# Altium PCB PCB2.PcbDoc
Units mm, origin at the board's own origin, x right, y up, seen from the top; angles counter-clockwise.
Board outline 100 x 60 mm, 2 copper layers (Top Layer, Bottom Layer); 35 components, 24 nets, 81 pads, 0 vias.
Unrouted connection lines stored in the file: 1.
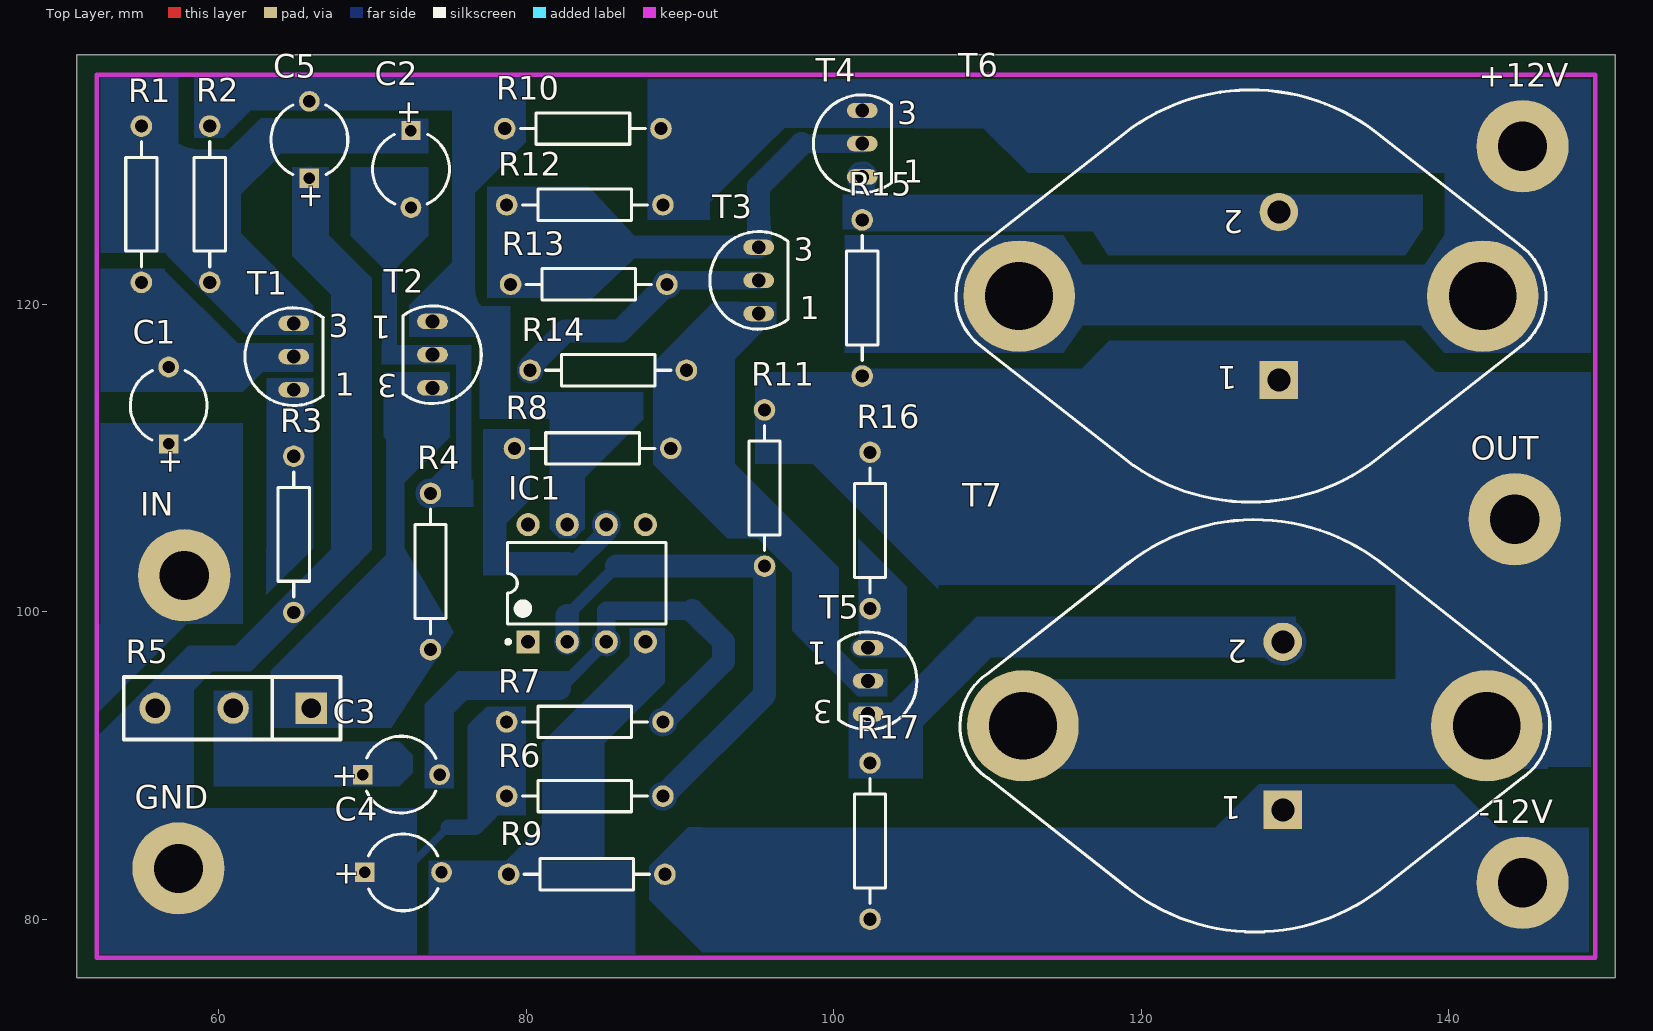
[diagram p0: Top Layer view]
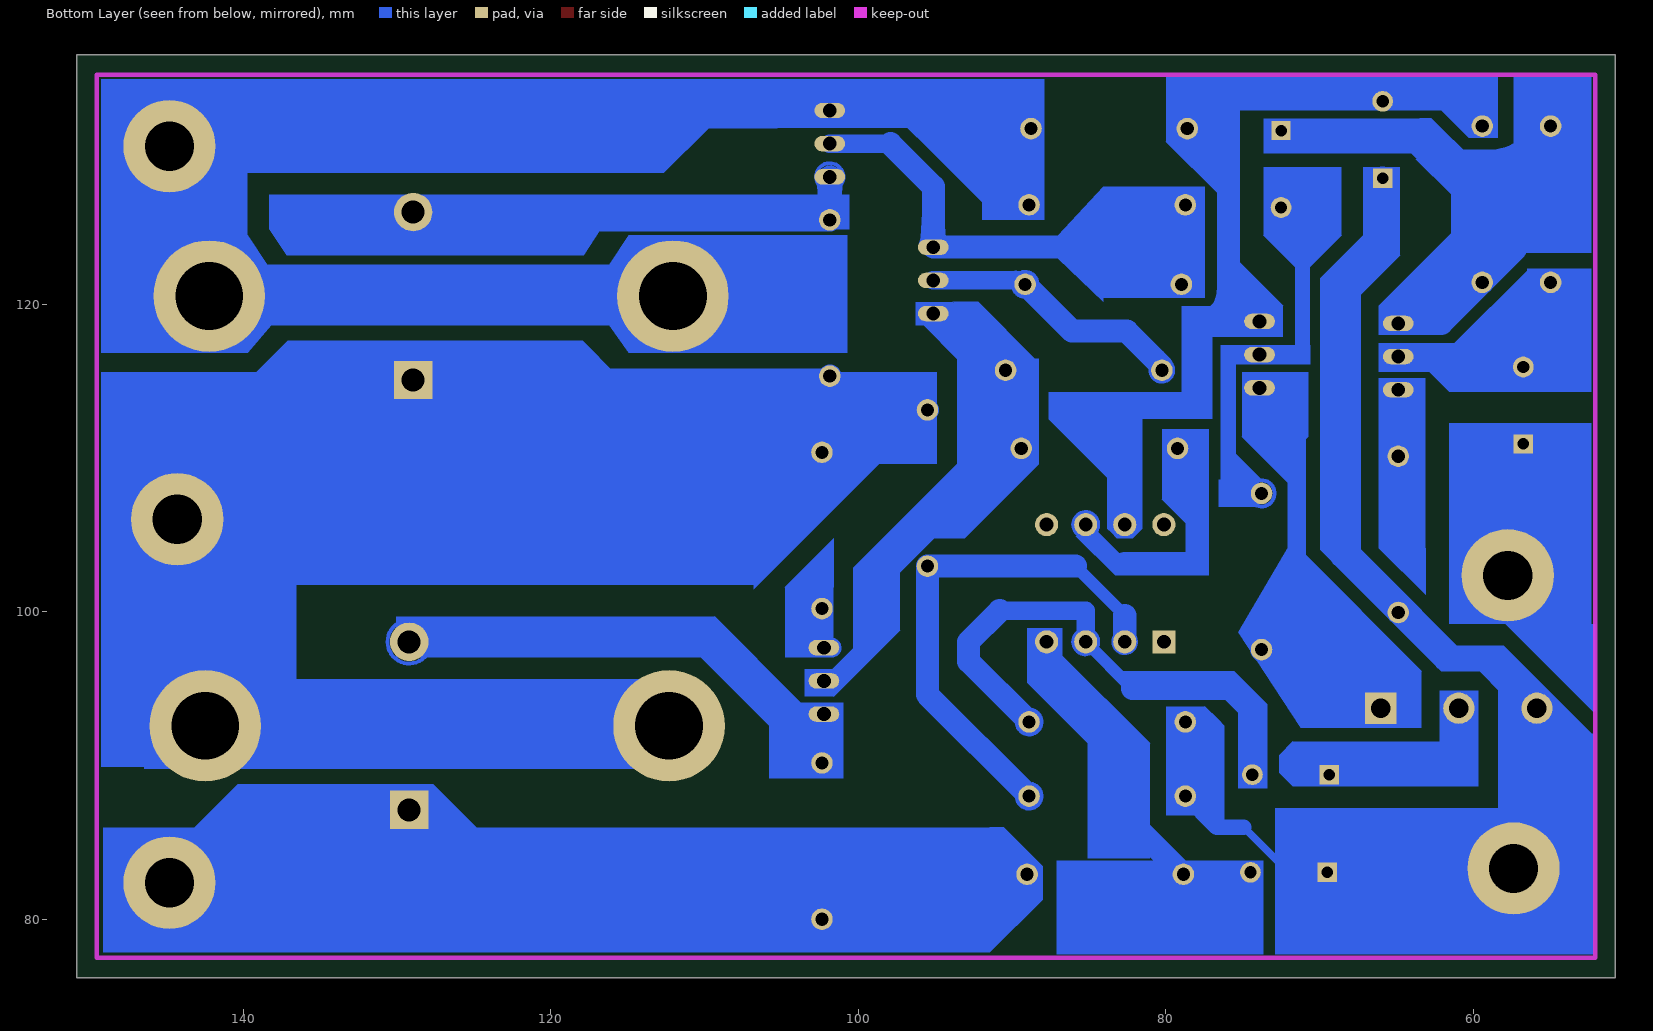
[diagram p1: Bottom Layer view, seen from below]

## Layer stack, top to bottom
Top Solder: solder mask 0.0102, Solder Resist, Dk 3.5
Top Layer: signal copper 0.0356
Dielectric 1: dielectric 0.32, FR-4, Dk 4.8
Bottom Layer: signal copper 0.0356
Bottom Solder: solder mask 0.0102, Solder Resist, Dk 3.5

## Board outline
50.8,76.2 150.8,76.2 150.8,136.2 50.8,136.2

## Design rules (kind name [scope] priority, off if disabled: settings)
Clearance [All] p1: gap=0.3
PolygonConnect [All] p1: connectstyle=Relief reliefconductorwidth=0.254 reliefentries=4 polygonreliefangle="90 Angle" airgapwidth=0.254
RoutingVias [All] p1: holewidth=0.8 width=1.6 viastyle="Through Hole" minholewidth=0.711 minwidth=1.27 maxholewidth=0.711 maxwidth=1.27
SolderMaskExpansion [All] p1: expansion=0.102
Width [All] p1: maxlimit=0.3 minlimit=0.3 preferedwidth=0.3
30 further rules are at their usual default settings.

## Components (designator, comment, footprint, x,y, rotation, side; value= is the part's Value field where it differs from the comment)
+12V "TP" TP2 144.78,130.264 r0 top
-12V "TP" TP2 144.78,82.385 r0 top
C1 "" CAPPR5-5x5 56.769,113.411 r90 top
C2 "" CAPPR5-5x5 72.517,128.778 r270 top
C3 "" CAPPR5-5x5 71.882,89.408 r0 top
C4 "" CAPPR5-5x5 72.009,83.058 r0 top
C5 "" CAPPR5-5x5 65.913,130.683 r90 top
GND "TP" TP2 57.404,83.312 r0 top
IC1 "uA741" DIP-8 83.947,101.854 r90 top
IN "TP" TP2 57.785,102.362 r0 top
OUT "TP" TP2 144.272,106.007 r0 top
R1 "" AXIAL-0.4 54.991,126.492 r90 top
R2 "" AXIAL-0.4 59.436,126.492 r90 top
R3 "" AXIAL-0.4 64.897,105.029 r90 top
R4 "" AXIAL-0.4 73.787,102.616 r270 top
R5 "RPOT" RPOT 66.04,93.726 r180 top
R6 "" AXIAL-0.4 83.82,88.011 r0 top
R7 "" AXIAL-0.4 83.82,92.837 r0 top
R8 "" AXIAL-0.4 84.328,110.617 r0 top
R9 "" AXIAL-0.4 83.947,82.931 r0 top
R10 "" AXIAL-0.4 83.693,131.407 r0 top
R11 "" AXIAL-0.4 95.504,108.039 r90 top
R12 "" AXIAL-0.4 83.82,126.454 r0 top
R13 "" AXIAL-0.4 84.074,121.285 r180 top
R14 "" AXIAL-0.4 85.344,115.697 r180 top
R15 "" AXIAL-0.4 101.854,120.396 r270 top
R16 "" AXIAL-0.4 102.362,105.283 r90 top
R17 "" AXIAL-0.4 102.362,85.09 r90 top
T1 "9014" TANS 64.897,116.586 r0 top
T2 "9012" TANS 73.914,116.713 r180 top
T3 "9014" TANS 95.123,121.539 r0 top
T4 "8050" TANS 101.854,130.429 r0 top
T5 "8550" TANS 102.235,95.504 r180 top
T6 "2N3055" TO-3 127.127,120.523 r180 top
T7 "2N3055" TO-3 127.381,92.583 r180 top

## Footprints (in the part's own frame and the unit in brackets; to place one, negate y for a bottom-side part, rotate by r counter-clockwise, add the part's x,y. Pads: shape width x height; smd on the part's side, far side on the other; paste and mask are expansions set on the pad)
AXIAL-0.4 [mm] "Axial Device, Thru-Hole; 2 Leads; 0.4 in Pin Spacing"
  round 1.4 hole 0.85: 1(-5.08,0) 2(5.08,0)
  silkscreen extent -4.06,-1.02 4.06,1.02
CAPPR5-5x5 [mm] "Capacitor, Electrolytic, Radial; Body 5 x 5 mm (Dia.xH typ); Pin Spacing 5 mm (typ)"
  rect 1.25x1.25 hole 0.75: 1(-2.5,0)
  round 1.35 hole 0.8: 2(2.5,0)
  silkscreen extent -2.26,-2.5 2.27,2.5
DIP-8 [mm] "DIP; 8 Leads; Row Spacing 7.62 mm; Pitch 2.54 mm"
  rect 1.5x1.5 hole 0.9: 1(-3.81,3.81)
  round 1.5 hole 0.9: 2(-3.81,1.27) 3(-3.81,-1.27) 4(-3.81,-3.81) 5(3.81,-3.81) 6(3.81,-1.27) 7(3.81,1.27) 8(3.81,3.81)
  silkscreen extent -3.93,-5.15 2.65,5.23, body extent -3.6,-5.15 3.6,5.15, height 5.08
RPOT [mil]
  rect 80x80 hole 50: 1(0,0)
  round 80 hole 50: 2(200,0) 3(400,0)
  silkscreen extent -75,-80 480,80
TANS [mm] "TO, Flat Index; 3 In-Line, Axial Leads; Body Dia. 4.5mm; Leads 0.51 x 0.48 mm (max)"
  oval 2x1 hole 0.9: 1(0,-2.159) 2(0,0) 3(0,2.159)
  silkscreen extent -3.17,-3.17 1.92,3.17
TO-3 [mm]
  rect 2.5x2.5 hole 1.5: 1(-1.815,5.46)
  round 2.5 hole 1.5: 2(-1.815,-5.46)
  round 7.25 hole 4.4: 3(-15.075,0) 3(15.075,0)
  silkscreen extent -19.17,-13.4 19.17,13.4
TP2 [mm]
  round 6 hole 3.2: 1(0,0)

## Part data
C1 C2 C3 C4 C5: library part Cap, "Capacitor"
IC1: "OAP"
R1 R2 R3 R4 R6 R7 R8 R9 R10 R11 R12 R13 R14 R15 R16 R17: library part Res2, "Resistor"
R5: "Potentiometer"
T1 T3 T4 T6 T7: library part 2N3904, "NPN General Purpose Amplifier"
T2 T5: library part 2N3906, "PNP General Purpose Amplifier"

## Nets (pads, with @x,y where several pads share a name; then routed paths per layer and width w, separated by ;. In a path a pad name is that pad's centre, name@x,y a point inside that pad or via, vN(x,y) a via of type N, cw(c..) or ccw(c..) an arc to the next point about the centre after c; other vN are vias at no path point)
1: IC1.1
8: IC1.8
+12: +12V.1 R10.2 R12.2 T4.3 T6.3 | length 103.4
  Bottom Layer w0.3: R10.2 R10.2@88.9,131.28
  Bottom Layer w1: 96.901,132.588 T4.3
  Bottom Layer w1.5: R10.2 95.72,131.407 96.901,132.588 ; T4.3 111.125,132.588 ; T6.3@112.052,120.523 T6.3@142.202,120.523
  Bottom Layer w2: R12.2 R10.2@88.9,131.28 ; 111.125,132.588 113.449,130.264 +12V.1 144.78,123.101 T6.3@142.202,120.523
-12: -12V.1 R9.2 R17.1 T7.1 | length 61.9
  Bottom Layer w1.5: R9.2 99.441,82.931 R17.1 122.083,80.01
  Bottom Layer w2: 122.083,80.01 T7.1 140.042,87.123 -12V.1
GND: C4.1 C5.1 GND.1 R3.1 R5.3 R6.1 R7.1 | length 81.8
  Bottom Layer w0.3: GND.1@55.88,84.836 GND.1 ; C4.1@69.255,83.312 C4.1 ; 71.247,83.058 72.009,83.058
  Bottom Layer w0.5: 72.009,83.058 74.93,85.979
  Bottom Layer w1: 74.93,85.979 76.708,85.979 R6.1
  Bottom Layer w1.2: 68.58,103.632 68.58,121.031
  Bottom Layer w1.5: R5.3 59.055,96.901 61.849,96.901 R3.1 68.58,103.632 ; C5.1 65.913,123.698 68.58,121.031 ; C4.1 71.247,83.058
  Bottom Layer w2: GND.1@55.88,84.836 R5.3 ; GND.1 C4.1@69.255,83.312 ; R6.1 R7.1
NetC1_1: C1.1 IN.1 | length 9
  Bottom Layer w1.5: C1.1 57.785,109.895 IN.1
NetC1_2: C1.2 R1.1 T1.2 | length 14.6
  Bottom Layer w1.5: R1.1 54.991,117.689 C1.2 57.444,116.586 T1.2
NetC2_1: C2.1 R1.2 R2.1 T1.3 | length 34.6
  Bottom Layer w1.2: 64.476,131.278 C2.1
  Bottom Layer w1.5: R1.2 57.277,129.286 ; 64.476,131.278 62.484,129.286 57.277,129.286 ; T1.3 62.103,118.745 R2.1 57.277,123.571 57.277,129.286
NetC2_2: C2.2 R4.1 T2.2 | length 31.1
  Bottom Layer w0.254: 74.639,107.696 ccw(c73.787,107.696) 74.639,107.696
  Bottom Layer w0.3: 71.12,116.967 71.374,116.713 ; 75.438,116.713 75.946,116.205
  Bottom Layer w1: 71.12,116.967 71.12,124.881 ; 71.374,116.713 T2.2 75.438,116.713 ; 75.946,107.696 75.946,116.205
  Bottom Layer w1.3: R4.1 75.946,107.696
  Bottom Layer w1.5: 71.12,124.881 C2.2
NetC3_1: C3.1 R5.2 | length 11.8
  Bottom Layer w1.5: R5.2 60.96,91.059 62.611,89.408 C3.1
NetC3_2: C3.2 IC1.3 R7.2 | length 44.4
  Bottom Layer w0.254: 86.03,98.044 ccw(c85.217,98.044) 86.03,98.044 ; 89.713,92.837 ccw(c88.9,92.837) 89.713,92.837
  Bottom Layer w0.8: 82.169,94.996 IC1.3
  Bottom Layer w1.2: IC1.3 85.217,100.076 90.805,100.076
  Bottom Layer w1.5: C3.2 74.382,93.559 75.819,94.996 82.169,94.996 ; R7.2 92.837,96.774 92.837,98.044 90.805,100.076
NetC4_2: C4.2 IC1.4 R9.1 | length 23.2
  Bottom Layer w0.3: C4.2 C4.2@74.636,82.931
  Bottom Layer w1.5: C4.2@74.636,82.931 R9.1 82.677,86.741 82.677,90.551 87.757,95.631 IC1.4
NetC5_2: C5.2 IC1.7 R2.2 R10.1 T2.1 | length 56.9
  Bottom Layer w0.3: 75.946,133.183 76.837,133.183
  Bottom Layer w1.2: 61.047,133.183 C5.2 75.946,133.183
  Bottom Layer w1.5: R2.2 61.047,133.183 ; T2.1 75.946,118.872 ; 75.946,133.183 75.946,120.904 75.946,118.872 ; 76.837,133.183 R10.1 ; IC1.7 82.677,113.411 77.978,113.411 77.978,118.872 75.946,118.872
NetIC1_2: IC1.2 R6.2 R11.1 | length 43.3
  Bottom Layer w0.254: IC1.2@83.418,98.044 ccw(c82.677,98.044) IC1.2@83.418,98.044 ; 89.713,88.011 ccw(c88.9,88.011) 89.713,88.011
  Bottom Layer w0.8: 82.677,99.746 85.89,102.959
  Bottom Layer w1.5: IC1.2 82.677,99.746 ; 85.89,102.959 R11.1 95.504,94.615 R6.2
NetIC1_6: IC1.6 R8.1 | length 21.8
  Bottom Layer w0.254: 86.03,105.664 ccw(c85.217,105.664) 86.03,105.664
  Bottom Layer w0.5: 82.677,103.124 IC1.6
  Bottom Layer w1.2: 78.105,103.378 78.105,110.617
  Bottom Layer w1.5: 78.105,103.378 78.359,103.124 82.677,103.124 ; 78.105,110.617 R8.1
NetOUT_1: OUT.1 R11.2 R15.2 R16.2 T6.1 T7.3 | length 102.4
  Bottom Layer w0.3: R15.2 R15.2@102.107,115.063 ; 102.07,113.119 102.235,113.284 102.362,113.157 ; T7.3@142.456,92.583 T7.3@144.272,94.399
  Bottom Layer w1.5: R11.2 102.07,113.119 ; 101.854,113.246 R15.2 ; R15.2@102.107,115.063 T6.1 135.216,115.063 ; R16.2 102.362,113.157
  Bottom Layer w2: T7.3@112.306,92.583 T7.3@142.456,92.583 ; 135.216,115.063 OUT.1 T7.3@144.272,94.399
NetR3_2: R3.2 T1.1 | length 4.5
  Bottom Layer w0.3: R3.2@64.516,110.109 R3.2@64.897,110.49
  Bottom Layer w1.5: R3.2@64.897,110.49 T1.1
NetR4_2: R4.2 R5.1 T2.3 | length 28.6
  Bottom Layer w0.3: R4.2@73.279,97.536 R4.2
  Bottom Layer w1.2: 71.501,99.314 71.501,112.141
  Bottom Layer w1.5: R5.1 69.977,93.726 R4.2 ; 71.501,99.314 R4.2@73.279,97.536 ; 71.501,112.141 T2.3
NetR8_2: R8.2 R14.1 T3.1 T5.2 | length 31.5
  Bottom Layer w0.3: 98.044,99.695 T5.2
  Bottom Layer w1.2: R8.2@90.043,110.617 98.044,102.616
  Bottom Layer w1.5: R8.2 90.424,111.633 R14.1 ; R14.1@90.678,115.951 94.107,119.38 T3.1 ; 98.044,99.695 98.044,102.616
NetR12_1: R12.1 R13.2 T3.3 T4.2 | length 33.5
  Bottom Layer w0.3: R13.2@78.74,121.539 R13.2
  Bottom Layer w1.2: 97.917,130.429 T4.2
  Bottom Layer w1.5: 78.74,123.698 T3.3 95.123,127.635 97.917,130.429
  Bottom Layer w2: R13.2@78.74,121.539 78.74,123.698 R12.1
NetR13_1: R13.1 R14.2 T3.2 | length 27.2
  Bottom Layer w0.254: 81.005,115.697 ccw(c80.264,115.697) 81.005,115.697 ; 89.967,121.285 ccw(c89.154,121.285) 89.967,121.285
  Bottom Layer w0.3: R14.2 R14.2@80.264,115.951 ; R13.1 R13.1@89.408,121.539
  Bottom Layer w1.2: R13.1@89.408,121.539 T3.2
  Bottom Layer w1.5: R14.2@80.264,115.951 82.55,118.237 86.106,118.237 R13.1
NetR15_1: R15.1 T4.1 T6.2 | length 35.7
  Bottom Layer w0.254: T4.1@102.743,128.27 ccw(c101.854,128.27) T4.1@102.743,128.27
  Bottom Layer w0.3: T6.2@128.435,125.476 T6.2
  Bottom Layer w1.5: T4.1 R15.1 T6.2@128.435,125.476
NetR16_1: R16.1 T5.1 | length 5.4
  Bottom Layer w0.254: T5.1@102.117,97.338 cw(c101.727,97.663) T5.1
  Bottom Layer w0.3: T5.1 T5.1@102.362,97.79
  Bottom Layer w1.2: T5.1@102.362,97.79 R16.1
NetR17_2: R17.2 T5.3 T7.2 | length 41.2
  Bottom Layer w0.254: 130.608,98.043 ccw(c129.196,98.043) 130.608,98.043
  Bottom Layer w0.3: T5.3 T5.3@102.362,93.218
  Bottom Layer w1.5: T5.3 105.156,93.345 ; R17.2 T5.3@102.362,93.218
  Bottom Layer w2: 105.156,93.345 110.109,98.298 128.941,98.298 T7.2
pads on no net: IC1.5
copper on no net: | length 0.3
  Top Layer w0.3: 59.436,131.572 59.436,131.826

## Keep-outs
Keep-Out Layer:
  lines w0.3: 52.1,77.5 149.5,77.5 149.5,134.9 52.1,134.9 52.1,77.5

## Other copper
Bottom Layer:
  rectangle net NetC2_1: 63.5,131.445 73.66,132.08
  rectangle net NetC2_2: 70.612,116.078 76.454,117.348
  rectangle net NetR17_2: 109.347,97.028 130.048,99.695
  rectangle net NetR17_2: 100.965,89.154 105.791,94.107
  rectangle net -12: 91.44,77.851 149.098,85.979
  rectangle net NetOUT_1: 94.869,109.601 149.225,115.57
  rectangle net NetOUT_1: 136.525,89.916 149.225,110.109
  rectangle net NetOUT_1: 111.633,89.789 146.431,95.631
  rectangle net NetOUT_1: 106.807,101.727 137.922,111.506
  rectangle net +12: 139.7,124.46 149.225,134.62
  rectangle net +12: 112.649,128.524 139.7,134.62
  rectangle net NetR15_1: 100.584,124.841 138.303,127.127
  rectangle net +12: 87.884,131.445 105.283,134.62
  rectangle net +12: 87.884,125.476 91.948,134.62
  rectangle net NetR12_1: 77.47,120.396 84.074,127.635
  rectangle net NetR8_2: 88.265,109.601 93.599,116.459
  rectangle net NetR8_2: 93.853,118.618 96.266,120.142
  rectangle net NetR8_2: 97.282,98.806 100.33,102.87
  rectangle net NetR8_2: 101.6,94.488 103.505,96.266
  rectangle net NetR16_1: 101.6,97.028 104.775,101.6
  rectangle net NetC1_1: 52.324,99.187 61.595,112.268
  rectangle net GND: 52.197,77.724 58.42,92.075
  rectangle net GND: 56.642,91.694 58.42,96.139
  rectangle net GND: 57.912,77.724 72.898,87.249
  rectangle net NetC3_1: 59.69,88.646 62.23,94.869
  rectangle net NetC3_1: 62.103,88.646 71.755,91.567
  rectangle net NetR4_2: 64.77,92.456 71.247,96.139
  rectangle net NetR4_2: 63.373,92.456 65.024,96.139
  rectangle net GND: 67.31,104.013 69.977,121.666
  rectangle net GND: 64.77,123.19 67.183,128.905
  rectangle net NetC2_2: 68.58,124.46 73.66,128.905
  rectangle net NetC2_1: 62.103,129.794 73.66,131.445
  rectangle net NetC1_2: 52.324,114.3 56.515,122.301
  rectangle net NetC1_2: 55.753,115.57 66.167,117.475
  rectangle net NetC1_2: 56.515,114.3 61.595,115.697
  rectangle net NetC2_1: 52.324,123.317 57.404,134.747
  rectangle net NetC5_2: 58.42,130.81 60.325,134.747
  rectangle net NetC5_2: 60.325,132.588 80.01,134.747
  rectangle net NetC5_2: 75.311,130.556 80.01,132.588
  rectangle net NetR4_2: 70.739,111.379 75.057,115.57
  rectangle net NetC2_2: 73.914,106.807 76.581,108.585
  rectangle net NetR3_2: 63.119,104.14 66.167,115.189
  rectangle net NetC2_1: 61.976,117.983 66.167,119.888
  rectangle net NetC2_1: 57.531,123.698 61.468,128.778
  rectangle net NetC5_2: 72.39,117.856 78.994,119.888
  rectangle net NetC5_2: 76.962,112.522 78.994,117.856
  rectangle net NetC5_2: 78.994,112.522 87.63,114.3
  rectangle net NetIC1_6: 77.216,107.315 80.264,111.887
  rectangle net NetIC1_6: 77.216,102.362 78.74,107.315
  rectangle net NetIC1_6: 78.74,102.362 83.312,103.759
  rectangle net NetC5_2: 81.788,105.41 83.566,112.776
  rectangle net NetC5_2: 81.534,105.41 83.82,106.553
  rectangle net NetC5_2: 81.534,106.553 83.82,112.522
  rectangle net NetC4_2: 73.66,77.724 87.122,83.82
  rectangle net GND: 77.47,86.741 80.01,93.853
  rectangle net NetC3_2: 73.406,88.519 75.311,93.98
  rectangle net NetC4_2: 81.026,83.947 85.09,91.44
  rectangle net NetC4_2: 86.741,95.377 89.027,98.933
  region net NetC2_1: 62.103,131.445 62.738,132.08 63.5,132.08 63.5,131.445
  region net NetC3_1: 71.755,91.567 72.644,90.678 72.644,89.535 71.755,88.646
  region net NetR17_2: 109.347,99.695 103.759,94.107 104.521,94.107 109.347,98.933
  region net -12: 124.587,85.725 127.635,88.773 140.335,88.773 143.905,85.203
  region net +12: 100.711,116.84 114.935,116.84 116.205,118.618 138.176,118.618 139.7,116.84 149.225,116.84 149.225,120.269 149.225,124.46 146.685,124.46 139.7,124.46 138.43,122.555 116.205,122.555 114.935,124.46 100.711,124.46
  region net +12: 112.649,128.524 109.728,131.445 105.283,131.445 105.283,134.62 112.649,134.62
  region net NetR15_1: 117.919,117.602 115.761,115.443 139.256,115.443 137.097,117.602
  region net NetR15_1: 116.778,124.841 117.851,123.19 137.165,123.19 138.266,124.841
  region net +12: 91.948,130.683 91.948,126.619 96.139,130.81
  region net NetR12_1: 84.074,127.635 84.074,124.46 86.995,124.46
  region net NetR12_1: 86.995,122.936 84.074,122.936 84.074,120.142
  region: 88.265,116.459 90.17,116.459
  region: 88.265,116.459 90.17,116.459
  region net NetR8_2: 88.519,116.459 92.202,120.142 93.853,120.142 90.17,116.459
  region net NetR8_2: 91.885,116.395 94.107,118.618 95.758,118.618 93.535,116.395
  region net NetR8_2: 88.265,109.601 93.091,104.775 95.25,104.775 90.424,109.601
  region net NetR8_2: 91.44,109.601 98.171,102.87 100.33,102.87 93.599,109.601
  region net NetR8_2: 97.282,98.806 101.6,94.488 101.6,96.139 98.933,98.806
  region net NetR8_2: 100.33,98.806 99.06,98.806 99.06,98.298 100.33,97.028
  region net NetR16_1: 101.6,101.6 104.775,101.6 101.6,104.775
  region net NetOUT_1: 106.807,101.473 98.679,109.601 106.807,109.601
  region net -12: 88.011,83.439 90.551,85.979 91.44,85.979 91.44,83.439
  region net -12: 88.011,83.439 88.011,81.28 91.44,77.851 91.44,83.439
  region net GND: 67.31,104.013 59.436,96.139 62.103,96.139 69.977,104.013
  region net GND: 61.206,97.79 58.039,97.79 52.324,92.075 55.675,92.075
  region net NetR4_2: 71.247,92.456 75.311,98.679 71.247,98.679
  region net NetR4_2: 63.373,96.139 71.247,104.013 71.247,101.854 71.247,96.139
  region net NetR4_2: 75.311,98.679 72.009,104.267 72.009,98.679
  region net GND: 69.977,121.666 66.675,124.968 66.675,123.952 68.961,121.666
  region net GND: 64.77,123.19 67.31,120.65 67.31,121.285 65.405,123.19
  region net NetC2_2: 68.58,124.46 70.612,122.428 70.612,124.46
  region net NetC2_2: 73.66,124.46 71.628,122.428 71.628,124.46
  region net NetC2_1: 62.103,131.445 60.579,129.921 62.103,129.921
  region net NetC1_2: 61.214,117.475 56.515,122.174 56.515,117.475
  region net NetC1_1: 57.912,99.187 52.197,93.472 52.1,93.569 52.1,99.187
  region net NetC1_2: 61.595,114.3 62.865,115.57 62.738,115.697 61.595,115.697
  region net NetC5_2: 60.325,130.81 62.103,132.588 61.468,132.588 60.325,131.445
  region net NetC5_2: 80.01,130.556 76.581,127.127 76.581,130.556
  region net NetR4_2: 70.739,111.379 70.993,111.125 70.929,111.379
  region net NetR4_2: 75.057,111.379 72.009,108.331 72.009,111.379
  region net NetC2_2: 73.787,108.585 75.438,110.236 75.438,108.585
  region net NetR3_2: 66.167,104.14 63.119,101.092 63.119,104.14
  region net NetC2_1: 66.167,119.888 58.166,127.889 58.166,123.444 61.722,119.888
  region net NetC2_1: 63.754,129.413 61.468,127.127 61.468,129.413
  region net NetC5_2: 72.39,119.888 75.311,122.809 75.311,119.888
  region net NetIC1_6: 80.264,107.315 78.486,105.537 78.486,107.315
  region net NetIC1_6: 85.852,104.902 83.312,102.362 83.312,103.505 84.709,104.902
  region: 83.058,104.775 82.804,104.775 82.423,104.775
  region net NetC5_2: 81.534,105.41 82.169,104.775 83.185,104.775 83.566,105.156 83.82,105.41
  region net NetC5_2: 87.63,112.522 83.82,108.712 83.82,112.522
  region net GND: 77.47,93.853 76.581,92.964 76.2,92.583 76.2,86.487 77.47,86.487
  region net NetC3_2: 73.406,93.98 75.565,96.139 81.915,96.139 81.915,95.631 75.692,95.631 74.041,93.98
  region net NetC3_2: 81.915,96.139 82.804,96.139 81.915,95.25
  region net NetC4_2: 81.026,91.44 86.868,97.282 86.868,95.631 82.677,91.44
  region net NetC4_2: 85.09,91.44 89.027,95.377 88.265,95.377 84.582,91.694 84.582,91.44

## Dimensions
52.1,77.5 to 149.5,77.5 on Mechanical 1
52.1,77.5 to 52.1,134.9 on Mechanical 1

## Text inside footprints (layer, text, board x,y; h text height)
C1: Top Overlay "+" at 57.519,108.861 h1.5 r90
C2: Top Overlay "+" at 71.767,133.328 h1.5 r270
C3: Top Overlay "+" at 67.332,88.658 h1.5
C4: Top Overlay "+" at 67.459,82.308 h1.5
C5: Top Overlay "+" at 66.663,126.133 h1.5 r90
T1: Top Overlay "1" at 67.564,114.046 h1.5; Top Overlay "3" at 67.183,117.856 h1.5
T2: Top Overlay "1" at 71.247,119.253 h1.5 r180; Top Overlay "3" at 71.628,115.443 h1.5 r180
T3: Top Overlay "1" at 97.79,118.999 h1.5; Top Overlay "3" at 97.409,122.809 h1.5
T4: Top Overlay "1" at 104.521,127.889 h1.5; Top Overlay "3" at 104.14,131.699 h1.5
T5: Top Overlay "1" at 99.568,98.044 h1.5 r180; Top Overlay "3" at 99.949,94.234 h1.5 r180
T6: Top Overlay "2" at 126.619,126.111 h1.5 r180; Top Overlay "1" at 126.238,115.951 h1.5 r180
T7: Top Overlay "2" at 126.873,98.171 h1.5 r180; Top Overlay "1" at 126.492,88.011 h1.5 r180